# Altium PCB PCB1.PcbDoc
Units mil, origin at the board's own origin, x right, y up, seen from the top; angles counter-clockwise.
Board outline 4790.03 x 3274.3 mil, 2 copper layers (Top Layer, Bottom Layer); 54 components, 22 nets, 204 pads, 4 vias.
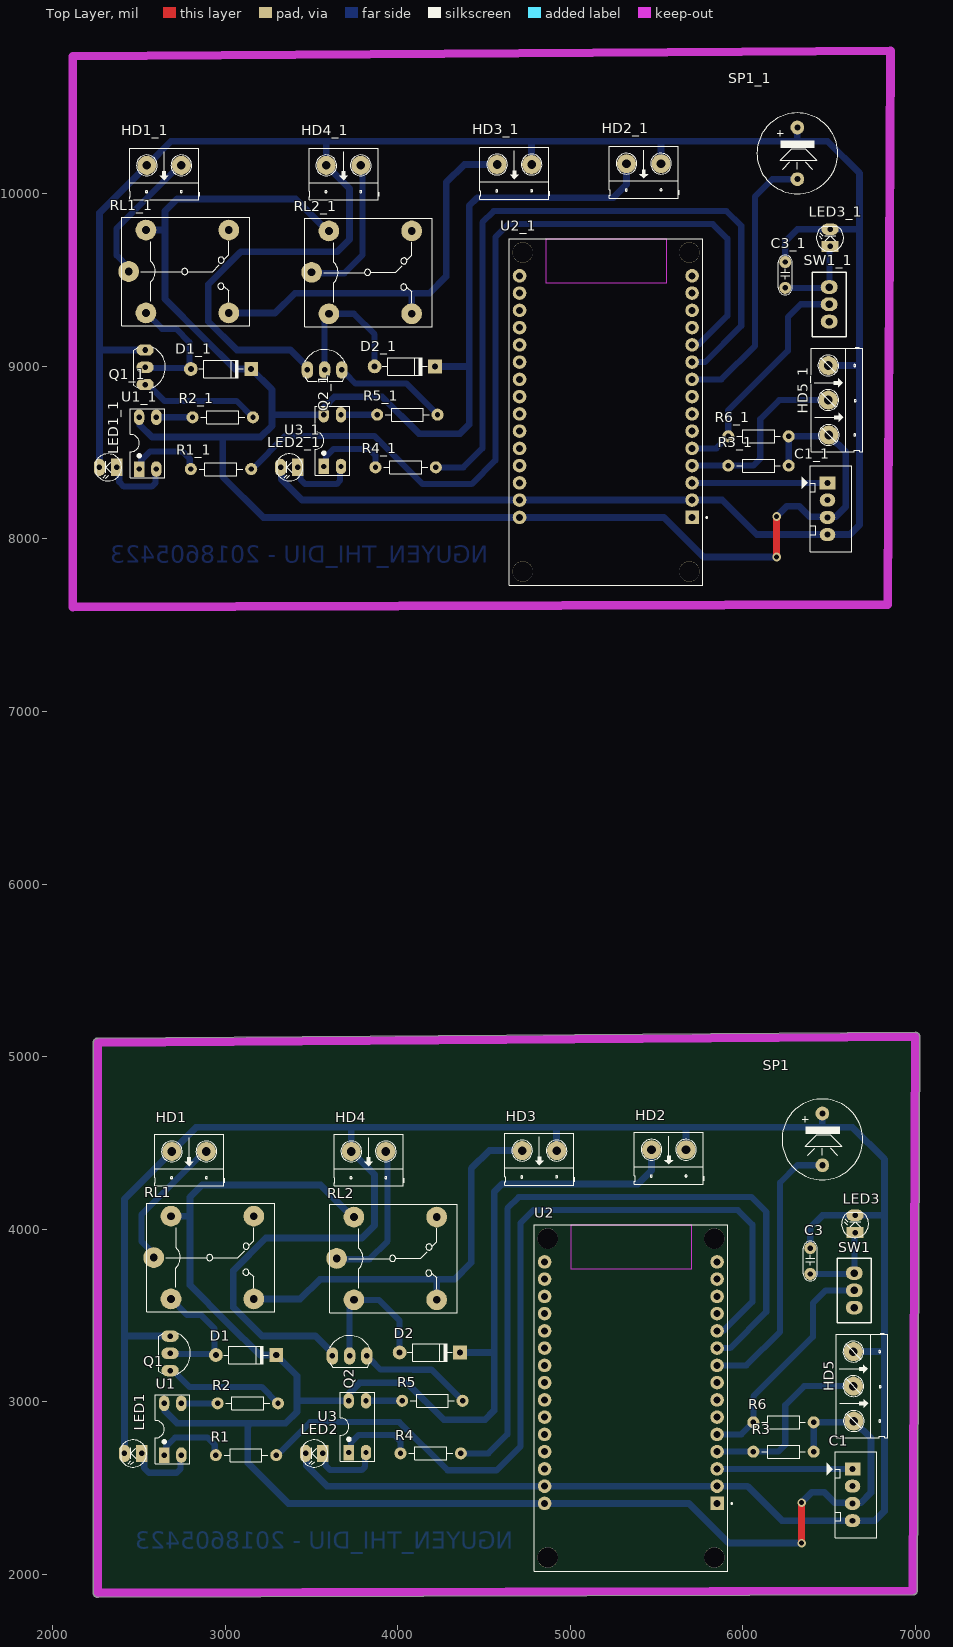
[diagram p0: Top Layer view]
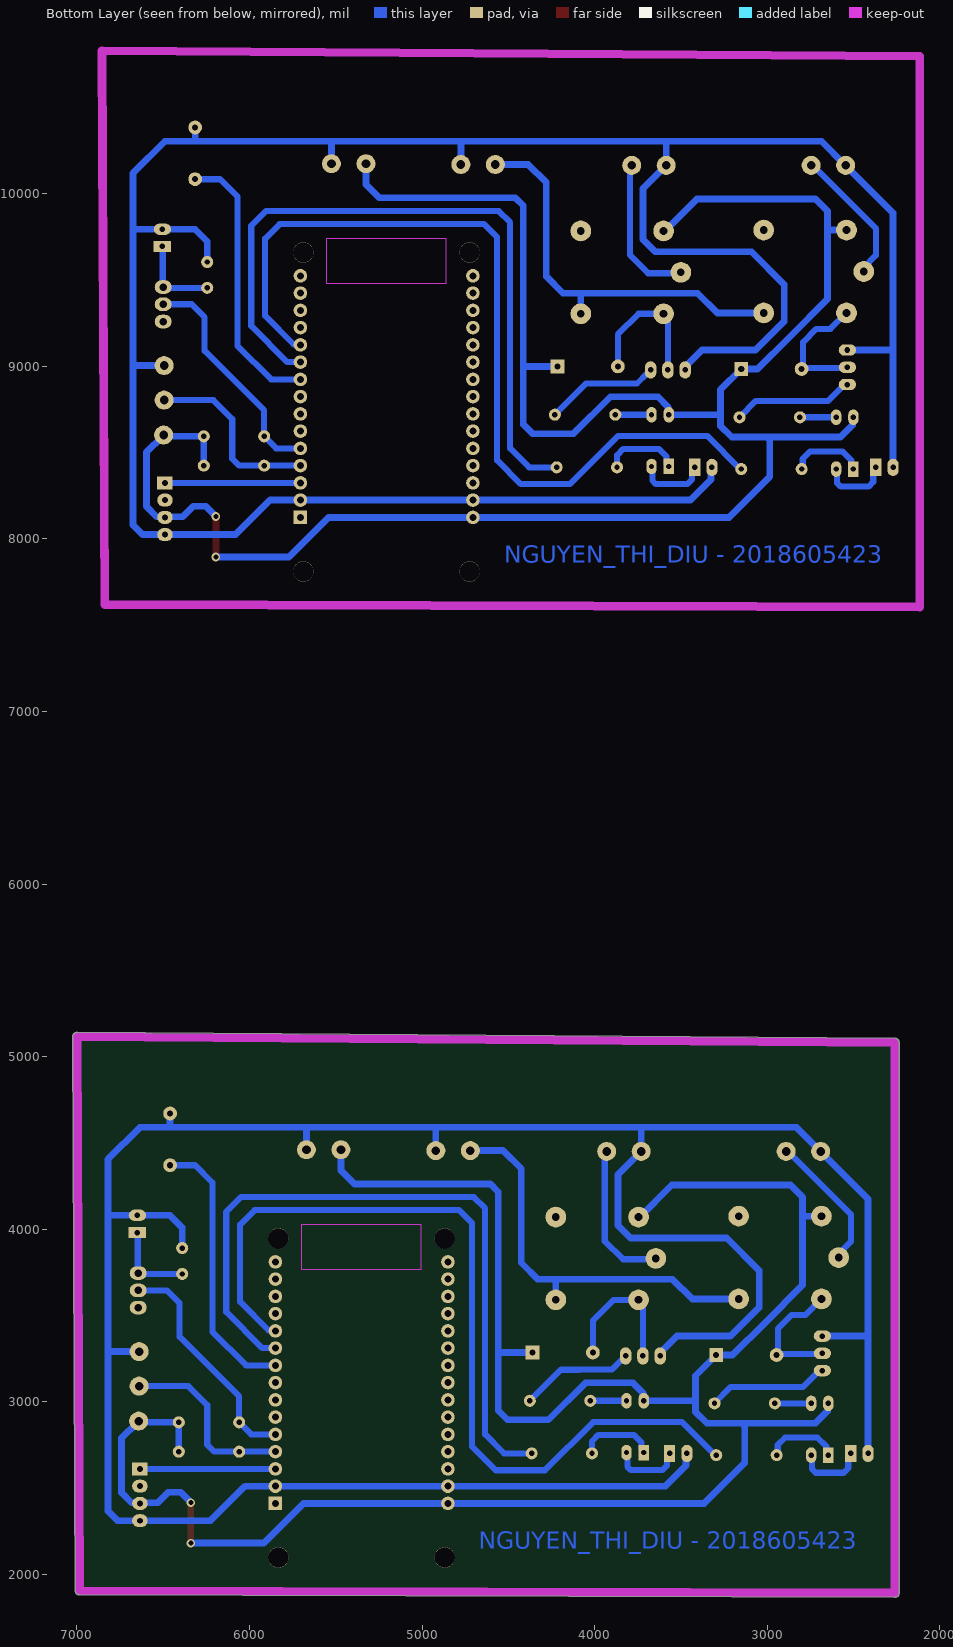
[diagram p1: Bottom Layer view, seen from below]

## Layer stack, top to bottom
Top Solder: solder mask 0.4, Solder Resist, Dk 3.5
Top Layer: signal copper 1.4
Dielectric 1: dielectric 12.6, FR-4, Dk 4.8
Bottom Layer: signal copper 1.4
Bottom Solder: solder mask 0.4, Solder Resist, Dk 3.5

## Board outline
2234.99,1890.73 ccw(c2260,1890.73) 2260.08,1865.71 6985.08,1879.99 ccw(c6985,1905) 7010.01,1904.92 7025.01,5114.85 ccw(c6999.92,5114.92) 6999.82,5140.01 2259.82,5106.63 ccw(c2260,5081.62) 2234.99,5081.62

## Design rules (kind name [scope] priority, off if disabled: settings)
Clearance [All] p1: gap=39.37 ignorepadtopadclearanceinfootprint=FALSE
PolygonConnect [All] p1: connectstyle=Relief reliefconductorwidth=10 reliefentries=4 polygonreliefangle="90 Angle" airgapwidth=10
RoutingVias [All] p1: holewidth=28 width=50 viastyle="Through Hole" minholewidth=28 minwidth=50 maxholewidth=28 maxwidth=50
SolderMaskExpansion [All] p1: expansion=4 istentingtop=FALSE
Width GND [InNet('GND')] p1: maxlimit=39.37 minlimit=39.37 preferedwidth=39.37
Width VCC_12V [InNet('+12')] p2: maxlimit=39.37 minlimit=39.37 preferedwidth=39.37
Width VCC_5V [InNet('+5')] p3: maxlimit=39.37 minlimit=39.37 preferedwidth=39.37
Width NET [All] p4: maxlimit=35.43 minlimit=35.43 preferedwidth=35.43
30 further rules are at their usual default settings.

## Classes and differential pairs
component class Sheet1: C1 C3 D1 D2 HD1 HD2 HD3 HD4 HD5 LED1 LED2 LED3 Q1 Q2 R1 R2 R3 R4 R5 R6 RL1 RL2 SP1 SW1 U1 U2 U3

## Components (designator, comment, footprint, x,y, rotation, side; value= is the part's Value field where it differs from the comment)
C1 "Header4" Header4 6635,2610 r270 top
C1_1 "Header4" Header4 6490,8325 r270 top (schematic designator C1)
C3 "103" CN1.5 6390,3890 r270 top value=0.01uF
C3_1 "103" CN1.5 6245,9605 r270 top value=0.01uF (schematic designator C3)
D1 "1N4007" D1A 2945,3270 r180 top
D1_1 "1N4007" D1A 2800,8985 r180 top (schematic designator D1)
D2 "1N4007" D1A 4010,3285 r180 top
D2_1 "1N4007" D1A 3865,9000 r180 top (schematic designator D2)
HD1 "Header 2" HED2 2890,4450 r180 top
HD1_1 "Header 2" HED2 2745,10165 r180 top (schematic designator HD1)
HD2 "Header 2" HED2 5670,4460 r180 top
HD2_1 "Header 2" HED2 5525,10175 r180 top (schematic designator HD2)
HD3 "Header 2" HED2 4920,4455 r180 top
HD3_1 "Header 2" HED2 4775,10170 r180 top (schematic designator HD3)
HD4 "Header 2" HED2 3930,4450 r180 top
HD4_1 "Header 2" HED2 3785,10165 r180 top (schematic designator HD4)
HD5 "Header 3" HED3 6640,3290 r270 top
HD5_1 "Header 3" HED3 6495,9005 r270 top (schematic designator HD5)
LED1 "LED" LED-3 2515,2700 r180 top value="LED 3 ly Single Colour"
LED1_1 "LED" LED-3 2370,8415 r180 top value="LED 3 ly Single Colour" (schematic designator LED1)
LED2 "LED" LED-3 3565,2700 r180 top value="LED 3 ly Single Colour"
LED2_1 "LED" LED-3 3420,8415 r180 top value="LED 3 ly Single Colour" (schematic designator LED2)
LED3 "LED" LED-3 6650,3980 r90 top value="LED 3 ly Single Colour"
LED3_1 "LED" LED-3 6505,9695 r90 top value="LED 3 ly Single Colour" (schematic designator LED3)
Q1 "C1815" QTO-92 2680,3280 r270 top
Q1_1 "C1815" QTO-92 2535,8995 r270 top (schematic designator Q1)
Q2 "C1815" QTO-92 3720,3265 r0 top
Q2_1 "C1815" QTO-92 3575,8980 r0 top (schematic designator Q2)
R1 "1k" R1/4W 3295,2690 r180 top value="R1/4W - 1K"
R1_1 "1k" R1/4W 3150,8405 r180 top value="R1/4W - 1K" (schematic designator R1)
R2 "510" R1/4W 2955,2990 r0 top value="R1/4W - 1K"
R2_1 "510" R1/4W 2810,8705 r0 top value="R1/4W - 1K" (schematic designator R2)
R3 "4k7" R1/4W 6060,2710 r0 top value="R1/4W - 1K"
R3_1 "4k7" R1/4W 5915,8425 r0 top value="R1/4W - 1K" (schematic designator R3)
R4 "1k" R1/4W 4365,2700 r180 top value="R1/4W - 1K"
R4_1 "1k" R1/4W 4220,8415 r180 top value="R1/4W - 1K" (schematic designator R4)
R5 "510" R1/4W 4025,3005 r0 top value="R1/4W - 1K"
R5_1 "510" R1/4W 3880,8720 r0 top value="R1/4W - 1K" (schematic designator R5)
R6 "1k" R1/4W 6060,2880 r0 top value="R1/4W - 1K"
R6_1 "1k" R1/4W 5915,8595 r0 top value="R1/4W - 1K" (schematic designator R6)
RL1 "Relay 10A/12V" RL_SPDT_10A 2585,3835 r0 top value="Relay SPDT, 10A, 12V"
RL1_1 "Relay 10A/12V" RL_SPDT_10A 2440,9550 r0 top value="Relay SPDT, 10A, 12V" (schematic designator RL1)
RL2 "Relay 10A/12V" RL_SPDT_10A 3645,3830 r0 top value="Relay SPDT, 10A, 12V"
RL2_1 "Relay 10A/12V" RL_SPDT_10A 3500,9545 r0 top value="Relay SPDT, 10A, 12V" (schematic designator RL2)
SP1 "Speaker" SPK 6460,4670 r270 top value="Speaker Chip"
SP1_1 "Speaker" SPK 6315,10385 r270 top value="Speaker Chip" (schematic designator SP1)
SW1 "ATE1E-2M3-10-Z" SW_TOGGLE_ATE1E-2M3-10-Z 6645,3645 r270 top
SW1_1 "ATE1E-2M3-10-Z" SW_TOGGLE_ATE1E-2M3-10-Z 6500,9360 r270 top (schematic designator SW1)
U1 "PC817" DIP4/W0.3 2645,2690 r0 top
U1_1 "PC817" DIP4/W0.3 2500,8405 r0 top (schematic designator U1)
U2 "ESP32-DEVKIT-V1" MODULE_ESP32_DEVKIT_V1 5350,3020.83 r180 top
U2_1 "ESP32-DEVKIT-V1" MODULE_ESP32_DEVKIT_V1 5205,8735.83 r180 top (schematic designator U2)
U3 "PC817" DIP4/W0.3 3715,2705 r0 top
U3_1 "PC817" DIP4/W0.3 3570,8420 r0 top (schematic designator U3)

## Footprints (in the part's own frame and the unit in brackets; to place one, negate y for a bottom-side part, rotate by r counter-clockwise, add the part's x,y. Pads: shape width x height; smd on the part's side, far side on the other; paste and mask are expansions set on the pad)
CN1.5 [mil]
  round 70 hole 31: 1(0,0) 2(150,0)
  silkscreen extent -40,-40 190,40, body extent -40,-33 190,33, height 235
D1A [mil] "Diode 1A, W 100mil, L 350mil"
  round 80 hole 35: 1(0,0)
  rect 80x80 hole 35: 2(-350,0)
  silkscreen extent -305,-50 -45,50, body extent -386,-33 34,36, height 84
DIP4/W0.3 [mil] "4 PIN, W 300mil, Pin to pin 100mil"
  rect 60x90 hole 31: 1(0,0)
  oval 60x90 hole 31: 2(100,0) 3(100,300) 4(0,300)
  silkscreen extent -50,-50 150,350, body extent -59,-10 159,305, height 170
Header4 [mil] "CON4"
  rect 75x90 hole 34: 1(0,0)
  oval 75x90 hole 34: 2(100,0) 3(200,0) 4(300,0)
  silkscreen extent -100,-150 400,140, body extent -90,-90 398,136, height 276
HED2 [mil] "Header 2, 2 pin, hight 300mil, Pin to Pin 200, Colour Green"
  round 110 hole 50: 1(0,0) 2(200,0)
  silkscreen extent -106,-100 300,200, body extent -92,-140 302,155, height 394
HED3 [mil] "Header 3, 3 pin, hight 300mil, Pin to Pin 200, Colour Green"
  round 110 hole 50: 1(0,0) 2(200,0) 3(402.62,2.62)
  silkscreen extent -106,-100 500,200
LED-3 [mil] "LED 2 PIN, 3ly Only colour"
  rect 65x100 hole 32: 1(0,0)
  oval 65x100 hole 32: 2(100,0)
  silkscreen extent -29,-78 118,79, body extent -13,-75 125,75, height 217
MODULE_ESP32_DEVKIT_V1 [mm]
  rect 2x2 hole 1.02: 1(-12.7,15.515)
  round 2 hole 1.02: 2(-12.7,12.975) 3(-12.7,10.435) 4(-12.7,7.895) 5(-12.7,5.355) 6(-12.7,2.815) 7(-12.7,0.275) 8(-12.7,-2.265) 9(-12.7,-4.805) 10(-12.7,-7.345) 11(-12.7,-9.885) 12(-12.7,-12.425) 13(-12.7,-14.965) 14(-12.7,-17.505) 15(-12.7,-20.045) 16(12.7,-20.045) 17(12.7,-17.505) 18(12.7,-14.965) 19(12.7,-12.425) 20(12.7,-9.885) 21(12.7,-7.345) 22(12.7,-4.805) 23(12.7,-2.265) 24(12.7,0.275) 25(12.7,2.815) 26(12.7,5.355) 27(12.7,7.895) 28(12.7,10.435) 29(12.7,12.975) 30(12.7,15.515)
  round 3 hole 3 unplated: ""(-12.28,23.475) ""(-12.28,-23.475) ""(12.23,23.475) ""(12.23,-23.475)
  Keep-Out Layer region: 8.78,-25.475 -8.91,-25.475 -8.91,-18.985 8.78,-18.985
  Keep-Out Layer region: 8.78,-25.475 -8.91,-25.475 -8.91,-18.985 8.78,-18.985
  Keep-Out Layer region: 8.78,-25.475 -8.91,-25.475 -8.91,-18.985 8.78,-18.985
  silkscreen extent -14.95,-25.48 14.23,25.48
QTO-92 [mil] "TO-92"
  oval 66x100 hole 32: 1(-100,0) 2(0,0) 3(100,0)
  silkscreen extent -117,-65 120,118, body extent -109,-66 109,95, height 245
R1/4W [mil] "R 1/4W, 2 Pin, 350mil"
  round 70 hole 31: 1(0,0) 2(350,0)
  silkscreen extent 48,-38 302,38, body extent -40,-47 386,47, height 111
RL_SPDT_10A [mil] "Relay SPDT, 5 pin, 10A,W 650mil, L 800mil, H 800mil"
  round 120 hole 45: 1(0,0) 2(580,240) 3(580,-240) 4(100,-240) 5(100,240)
  silkscreen extent -40,-315 700,315, body extent -33,-307 719,303, height 642
SPK [mil] "Speaker Chip"
  round 80 hole 35: 1(0,0) 2(300,0)
  silkscreen extent -84,-234 384,234, body extent -221,-354 511,378, height 344
SW_TOGGLE_ATE1E-2M3-10-Z [mm]
  oval 2x2.5 hole 1.1: 1(-2.54,0) 2(0,0) 3(2.54,0)
  silkscreen extent -4.75,-2.5 4.75,2.5, body extent -4.75,-2.5 4.75,2.5, height 16.66

## Part data
C1 C1_1: "Header IDC, 4 x 1 Pin Vertical 2.54mm Pitch (Non-Boxed, Male)", Manufacturer="W¨¹rth Elektronik eiSos GmbH", partNo=613002143121, ComponentLink1 Description=Manufacturer, ComponentLink1URL=http://www.we-online.com, ComponentLink2 Description=Datasheet, ComponentLink2URL=http://katalog.we-online.de/em/datasheet/6130xx143121.pdf, Created by="Karrer Zheng", Created Date="29 March 2013", NoPins=02
C3 C3_1: library part CN1.5, "Cap np 682pF => 104pF"
D1 D1_1 D2 D2_1: library part D1A, "Diode 1A"
HD1 HD1_1 HD2 HD2_1 HD3 HD3_1 HD4 HD4_1: library part Hed2, "Header 2 (Green)"
HD5 HD5_1: library part Hed3, "Header 3 (Green)"
LED1 LED1_1 LED2 LED2_1 LED3 LED3_1: "LED Single colour Green and Red"
Q1 Q1_1 Q2 Q2_1: "NPN 600mW, ECB"
R1 R1_1 R2 R2_1 R3 R3_1 R4 R4_1 R5 R5_1 R6 R6_1: library part R1/4W, "Resistor 1/4W"
RL1 RL1_1 RL2 RL2_1: library part "Relay 1", "Relay SPDT,10A - 12VDC 5 Pin"
SP1 SP1_1: library part SPK, "Speaker Chip"
SW1 SW1_1: library part SW_TOGGLE_ATE1E-2M3-10-Z, "SWITCH TOGGLE SPDT 50MA 48V", Current Rating="50mA (AC/DC)", Illumination Type, Color=-, Manufacturer="Copal Electronics Inc.", Operating Temperature="-20°C ~ 85°C", Supplier Part Number 1=563-1159-ND, Voltage Rating - AC=48V, Actuator Length=6.00mm, Actuator Material=-, Actuator Type="Standard Round", Bushing Thread=Unthreaded, Category=Switches, Circuit=SPDT, ComponentLink1Description=https://www.nidec-copal-electronics.com/e/catalog/switch/ate.pdf, ComponentLink1URL=https://www.nidec-copal-electronics.com/e/catalog/switch/ate.pdf, Electrical Life="50,000 Cycles", Features=Washable, Illumination=Non-Illuminated, Illumination Voltage (Nominal)=-, Ingress Protection=-, Manufacturer Part Number=ATE1E-2M3-10-Z, Mounting Type="Through Hole", Packaging=Bulk, Panel Cutout Dimensions=-, Part Status=Active, Pricing 1="1=2.87, 10=2.752, 25=2.6324, 50=2.5126, 100=2.2733, 250=2.0938, 500=1.91434, 1000=1.67504, 5000=1.61522 (USD)", RoHS="RoHS Compliant", Stock 1=3693, Supplier 1=Digi-Key, Switch Function=On-Off-On, Termination Style="PC Pin", Voltage Rating - DC=48V
U1 U1_1 U3 U3_1: "Single Opto"
U2 U2_1: "Dual core, Wi-Fi: 2.4 GHz up to 150 Mbits/s,BLE (Bluetooth Low Energy) and legacy Bluetooth, 32 bits, Up to 240 MHz", Package=None, Availability="Not in stock", Check_prices=https://www.snapeda.com/parts/ESP32-DEVKIT-V1/Do+it/view-part/?ref=eda, MF="Do it", MP=ESP32-DEVKIT-V1, Price=None, SnapEDA_Link=https://www.snapeda.com/parts/ESP32-DEVKIT-V1/Do+it/view-part/?ref=snap

## Via types
v1: diameter 50, hole 28, Top Layer to Bottom Layer, 4 vias

## Nets (pads, with @x,y where several pads share a name; then routed paths per layer and width w, separated by ;. In a path a pad name is that pad's centre, name@x,y a point inside that pad or via, vN(x,y) a via of type N, cw(c..) or ccw(c..) an arc to the next point about the centre after c; other vN are vias at no path point)
+5: C1.3 D1.2 D2.2 HD2.2 HD5.3 R3.2 R6.2 RL1.5 RL2.5 U1.4 U2.30 U3.4 | length 12664.6
  Top Layer w39.37: v1(6340,2180) v1(6340,2415)
  Bottom Layer w39.37: U1.4 2648.95,2986.05 2648.95,2945.11 2719.06,2875 3145,2875 ; RL1.5 2795,4075 ; RL2.5 3737.7,4070 3552.7,4255 2865,4255 2795,4185 2795,4075 ; D2.2 4538.23,3285 ; HD2.2 5470,4340 5392.2,4262.2 4604.39,4262.2 4558.23,4216.04 4558.23,2948.23 4505,2895 4268.01,2895 4053.96,3109.06 3778.11,3109.06 3718.95,3049.89 3718.95,3008.95 U3.4 3425,3005 3415,3015 ; v1(6340,2180) 5917.11,2180 5687.11,2410 U2.30 3365,2410 3130,2645 3130,2860 3145,2875 ; v1(6340,2415) 6400,2475 6470.75,2475 6532.3,2413.44 6631.56,2413.44 C1.3 6638.44,2413.44 6682.49,2413.44 6741.26,2472.21 6741.26,2788.74 HD5.3@6650,2880 ; R3.2 R6.2 HD5.3@6650,2880 ; HD5.3 HD5.3@6650,2880 ; 2795,4075 2795,3675 3013.24,3456.76 3200,3270 D1.2 3415,3150 3415,3015 ; 3145,2875 3350,2875 3415,2940 3415,3015
+12: HD3.2 RL1.3 RL2.3 | length 2351.6
  Bottom Layer w39.37: RL1.3 3433.54,3595 3547.59,3709.06 4230,3709.06 ; RL2.3 4225,3704.06 4230,3709.06 ; HD3.2 4530,4455 4425,4350 4425,3805 4329.06,3709.06 4230,3709.06
COI: SP1.2 U2.9 | length 1597.2
  Bottom Layer w35.43: U2.9 6020,3210 6215,3405 6215,4270 6315,4370 SP1.2
DS18B20: HD5.2 R3.1 U2.4 | length 1067.1
  Bottom Layer w35.43: U2.4 R3.1@6045,2710 ; R3.1 6205,2710 6245,2750 6245,2980 6355,3090 HD5.2
FAN: R1.1 U2.11 | length 5094.7
  Bottom Layer w35.43: R1.1 3300.46,2690 3492.35,2881.89 4008.9,2881.89 4288.29,2602.5 4572.5,2602.5 4709.8,2739.8 4709.8,4034.8 4785,4110 5970,4110 6055,4025 6055,3578.59 5889.95,3413.54 5853.54,3413.54 U2.11
FLAME: C1.1 U2.3 | length 785
  Bottom Layer w35.43: U2.3 C1.1
GND: C1.4 C3.1 HD1.2 HD2.1 HD3.1 HD4.2 HD5.1 LED1.2 LED2.2 LED3.2 Q1.1 Q2.1 SP1.1 U2.2 U2.29 | length 15589.9
  Bottom Layer w39.37: LED1.2 2415,3375 ; Q1.1 2420,3380 2415,3375 ; LED2.2 3469.9,2695.1 3469.9,2629.08 3588.98,2510 U2.29 U2.2 6025,2510 6225,2310 C1.4 6765,2310 6820,2365 6820,3280 ; Q2.1 3620,3282 3522,3380 3211.63,3380 3045.94,3545.69 3045.94,3760.94 3234.06,3949.06 3792.42,3949.06 3864.06,4020.69 3864.06,4315.94 HD4.2 3730,4590 ; HD3.1 4920,4590 ; HD2.1 5670,4585 5665,4590 ; C3.1 6390,4010 6460,4080 LED3.2 6820,4080 ; SP1.1 6460,4590 ; HD5.1 6810,3290 6820,3280 ; 2415,3375 2415,4175 HD1.2 2830,4590 3730,4590 ; 3730,4590 4920,4590 ; 4920,4590 5665,4590 ; 5665,4590 6460,4590 ; 6460,4590 6635,4590 6820,4405 6820,4080 ; 6820,3280 6820,4080
MODE: R6.1 SW1.2 U2.5 | length 1343
  Bottom Layer w35.43: U2.5 5990,2810 R6.1 6060,3030 6405,3375 6405,3570 6480,3645 SW1.2
NetC3_2: C3.2 LED3.1 SW1.1 | length 503.5
  Bottom Layer w35.43: C3.2@6390,3730.65 C3.2 6640,3740 SW1.1 6647.5,3747.5 6647.5,3977.5 LED3.1
NetD1_1: D1.1 Q1.2 RL1.4 | length 742.5
  Bottom Layer w35.43: Q1.2 2685,3275 D1.1@2940,3275 ; RL1.4 2778.11,3501.89 2859.54,3501.89 2936.47,3424.96 2936.47,3278.53 D1.1@2940,3275 ; D1.1 D1.1@2940,3275
NetD2_1: D2.1 Q2.2 RL2.4 | length 847.1
  Bottom Layer w35.43: Q2.2 3720,3542.12 3745,3567.12 RL2.4 3890,3590 4010,3470 D2.1 D2.1@4001.47,3293.53
NetHD1_1: HD1.1 RL1.1 | length 805.2
  Bottom Layer w35.43: RL1.1 2585,3857.88 2515,3927.88 2515,4085 2880,4450 HD1.1
NetHD4_1: HD4.1 RL2.1 | length 865.4
  Bottom Layer w35.43: RL2.1 3650,3825 3835,3825 3940.83,3930.83 3940.83,4439.17 HD4.1
NetLED1_1: LED1.1 U1.2 | length 403.7
  Bottom Layer w35.43: LED1.1 2529.78,2685.22 2529.78,2615.22 2557.09,2587.91 2717.91,2587.91 2740.3,2610.3 2740.3,2685.3 U1.2
NetLED2_1: LED2.1 U3.2 | length 409.6
  Bottom Layer w35.43: LED2.1 3579.78,2685.22 3579.78,2630.22 3607.09,2602.91 3789.54,2602.91 3810.3,2623.67 3810.3,2700.3 U3.2
NetQ1_3: Q1.3 R2.2 | length 703.7
  Bottom Layer w35.43: Q1.3 2697,3180 2791.62,3085.38 3209.62,3085.38 R2.2
NetQ2_3: Q2.3 R5.2 | length 667.8
  Bottom Layer w35.43: Q2.3 3820,3256.27 3834.12,3242.15 3842.85,3242.15 3899.17,3185.83 4085.76,3185.83 4086.59,3185 4195,3185 R5.2
NetR1_2: R1.2 U1.1 | length 437.8
  Bottom Layer w35.43: U1.1 2657.28,2702.28 2657.28,2740.44 2708.93,2792.09 2895.54,2792.09 2938.39,2749.24 2938.39,2696.61 R1.2
NetR2_1: R2.1 U1.3 | length 210
  Bottom Layer w35.43: U1.3 R2.1
NetR4_2: R4.2 U3.1 | length 454
  Bottom Layer w35.43: U3.1 3727.28,2717.28 3727.28,2762.28 3772.09,2807.09 3977.91,2807.09 4015,2770 R4.2
NetR5_1: R5.1 U3.3 | length 210
  Bottom Layer w35.43: U3.3 R5.1
PUMP: R4.1 U2.10 | length 4140
  Bottom Layer w35.43: R4.1 4525,2700 4635,2810 4635,4120 4700.43,4185.43 6049.57,4185.43 6135,4100 6135,3520 5925,3310 U2.10
pads on no net: C1.2 C1_1.1 C1_1.2 C1_1.3 C1_1.4 C3_1.1 C3_1.2 D1_1.1 D1_1.2 D2_1.1 D2_1.2 HD1_1.1 HD1_1.2 HD2_1.1 HD2_1.2 HD3_1.1 HD3_1.2 HD4_1.1 HD4_1.2 HD5_1.1 HD5_1.2 HD5_1.3 LED1_1.1 LED1_1.2 LED2_1.1 LED2_1.2 LED3_1.1 LED3_1.2 Q1_1.1 Q1_1.2 Q1_1.3 Q2_1.1 Q2_1.2 Q2_1.3 R1_1.1 R1_1.2 R2_1.1 R2_1.2 R3_1.1 R3_1.2 R4_1.1 R4_1.2 R5_1.1 R5_1.2 R6_1.1 R6_1.2 RL1.2 RL1_1.1 RL1_1.2 RL1_1.3 RL1_1.4 RL1_1.5 RL2.2 RL2_1.1 RL2_1.2 RL2_1.3 RL2_1.4 RL2_1.5 SP1_1.1 SP1_1.2 SW1.3 SW1_1.1 SW1_1.2 SW1_1.3 U1_1.1 U1_1.2 U1_1.3 U1_1.4 U2. U2.1 U2.6 U2.7 U2.8 U2.12 U2.13 U2.14 U2.15 U2.16 U2.17 U2.18 U2.19 U2.20 U2.21 U2.22 U2.23 U2.24 U2.25 U2.26 U2.27 U2.28 U2_1. U2_1.1 U2_1.2 U2_1.3 U2_1.4 U2_1.5 U2_1.6 U2_1.7 U2_1.8 U2_1.9 U2_1.10 U2_1.11 U2_1.12 U2_1.13 U2_1.14 U2_1.15 U2_1.16 U2_1.17 U2_1.18 U2_1.19 U2_1.20 U2_1.21 U2_1.22 U2_1.23 U2_1.24 U2_1.25 U2_1.26 U2_1.27 U2_1.28 U2_1.29 U2_1.30 U3_1.1 U3_1.2 U3_1.3 U3_1.4
copper on no net: | length 51893.3
  Top Layer w39.37: v1(6195,7895) v1(6195,8130)
  Bottom Layer w35.43: 2370,8415 2384.78,8400.22 2384.78,8330.22 2412.09,8302.91 2572.91,8302.91 2595.3,8325.3 2595.3,8400.3 2600,8405 ; 2440,9550 2440,9572.88 2370,9642.88 2370,9800 2735,10165 2745,10165 ; 2500,8405 2512.28,8417.28 2512.28,8455.44 2563.93,8507.09 2750.54,8507.09 2793.39,8464.24 2793.39,8411.61 2800,8405 ; 2535,8895 2552,8895 2646.62,8800.38 3064.62,8800.38 3160,8705 ; 2535,8995 2540,8990 2795,8990 ; 2540,9310 2633.11,9216.89 2714.54,9216.89 2791.47,9139.96 2791.47,8993.53 2795,8990 ; 2600,8705 2810,8705 ; 2800,8985 2795,8990 ; 3150,8405 3155.46,8405 3347.35,8596.89 3863.9,8596.89 4143.29,8317.5 4427.5,8317.5 4564.8,8454.8 4564.8,9749.8 4640,9825 5825,9825 5910,9740 5910,9293.59 5744.95,9128.54 5708.54,9128.54 5705,9125 ; 3420,8415 3434.78,8400.22 3434.78,8345.22 3462.09,8317.91 3644.54,8317.91 3665.3,8338.67 3665.3,8415.3 3670,8420 ; 3500,9545 3505,9540 3690,9540 3795.83,9645.83 3795.83,10154.17 3785,10165 ; 3570,8420 3582.28,8432.28 3582.28,8477.28 3627.09,8522.09 3832.91,8522.09 3870,8485 3870,8415 ; 3575,8980 3575,9257.12 3600,9282.12 3600,9305 3745,9305 3865,9185 3865,9000 3856.47,9008.53 ; 3670,8720 3880,8720 ; 3675,8980 3675,8971.27 3689.12,8957.15 3697.85,8957.15 3754.17,8900.83 3940.76,8900.83 3941.59,8900 4050,8900 4230,8720 ; 4220,8415 4380,8415 4490,8525 4490,9835 4555.43,9900.43 5904.57,9900.43 5990,9815 5990,9235 5780,9025 5705,9025 ; 5705,8325 6490,8325 ; 5705,8425 5900,8425 ; 5705,8525 5845,8525 5915,8595 5915,8745 6260,9090 6260,9285 6335,9360 6500,9360 ; 5705,8925 5875,8925 6070,9120 6070,9985 6170,10085 6315,10085 ; 5915,8425 6060,8425 6100,8465 6100,8695 6210,8805 6495,8805 ; 6245,9445.65 6245,9455 6495,9455 6500,9460 6502.5,9462.5 6502.5,9692.5 6505,9695
  Bottom Layer w39.37: 2270,8415 2270,9090 ; 2500,8705 2503.95,8701.05 2503.95,8660.11 2574.06,8590 3000,8590 ; 2535,9095 2275,9095 2270,9090 ; 2540,9790 2650,9790 ; 3020,9310 3288.54,9310 3402.59,9424.06 4085,9424.06 ; 3320,8415 3324.9,8410.1 3324.9,8344.08 3443.98,8225 4705,8225 5705,8225 5880,8225 6080,8025 6490,8025 6620,8025 6675,8080 6675,8995 ; 3475,8980 3475,8997 3377,9095 3066.63,9095 2900.94,9260.69 2900.94,9475.94 3089.06,9664.06 3647.42,9664.06 3719.06,9735.69 3719.06,10030.94 3585,10165 3585,10305 ; 3600,9785 3592.7,9785 3407.7,9970 2720,9970 2650,9900 2650,9790 ; 4080,9305 4080,9419.06 4085,9424.06 ; 4215,9000 4393.23,9000 ; 4575,10170 4385,10170 4280,10065 4280,9520 4184.06,9424.06 4085,9424.06 ; 4775,10170 4775,10305 ; 5325,10175 5325,10055 5247.2,9977.2 4459.39,9977.2 4413.23,9931.04 4413.23,8663.23 4360,8610 4123.01,8610 3908.96,8824.06 3633.11,8824.06 3573.95,8764.89 3573.95,8723.95 3570,8720 3280,8720 3270,8730 ; 5525,10175 5525,10300 5520,10305 ; v1(6195,7895) 5772.11,7895 5542.11,8125 4705,8125 3220,8125 2985,8360 2985,8575 3000,8590 ; v1(6195,8130) 6255,8190 6325.75,8190 6387.3,8128.44 6486.56,8128.44 6490,8125 6493.44,8128.44 6537.49,8128.44 6596.26,8187.21 6596.26,8503.74 6505,8595 ; 6245,9605 6245,9725 6315,9795 6505,9795 6675,9795 ; 6265,8425 6265,8595 6505,8595 ; 6315,10385 6315,10305 ; 6495,9005 6665,9005 6675,8995 ; 6497.62,8602.38 6505,8595 ; 2270,9090 2270,9890 2545,10165 2685,10305 3585,10305 ; 2650,9790 2650,9390 2868.24,9171.76 3055,8985 3150,8985 3270,8865 3270,8730 ; 3000,8590 3205,8590 3270,8655 3270,8730 ; 3585,10305 4775,10305 ; 4775,10305 5520,10305 ; 5520,10305 6315,10305 ; 6315,10305 6490,10305 6675,10120 6675,9795 ; 6675,8995 6675,9795

## Keep-outs
Keep-Out Layer:
  lines w50: 2115,7605.73 6840,7620 6855,10830 2115,10796.62 2115,9757.5 2115,8642.5 2115,7605.73 ; 2260,1890.73 2260,2927.5 2260,4042.5 2260,5081.62 7000,5115 6985,1905 2260,1890.73

## Other copper
Bottom Layer:
  text "NGUYEN_THI_DIU - 2018605423" at 4525,7863.33 h100
  text "NGUYEN_THI_DIU - 2018605423" at 4670,2148.33 h100